# Altium PCB 120W_Syn_Buck_100kHz.PcbDoc
Units mm, origin at the board's own origin, x right, y up, seen from the top; angles counter-clockwise.
Board outline 120 x 80 mm, 2 copper layers (Top Layer, Bottom Layer); 58 components, 34 nets, 191 pads, 2 vias.
Unrouted connection lines stored in the file: 42.
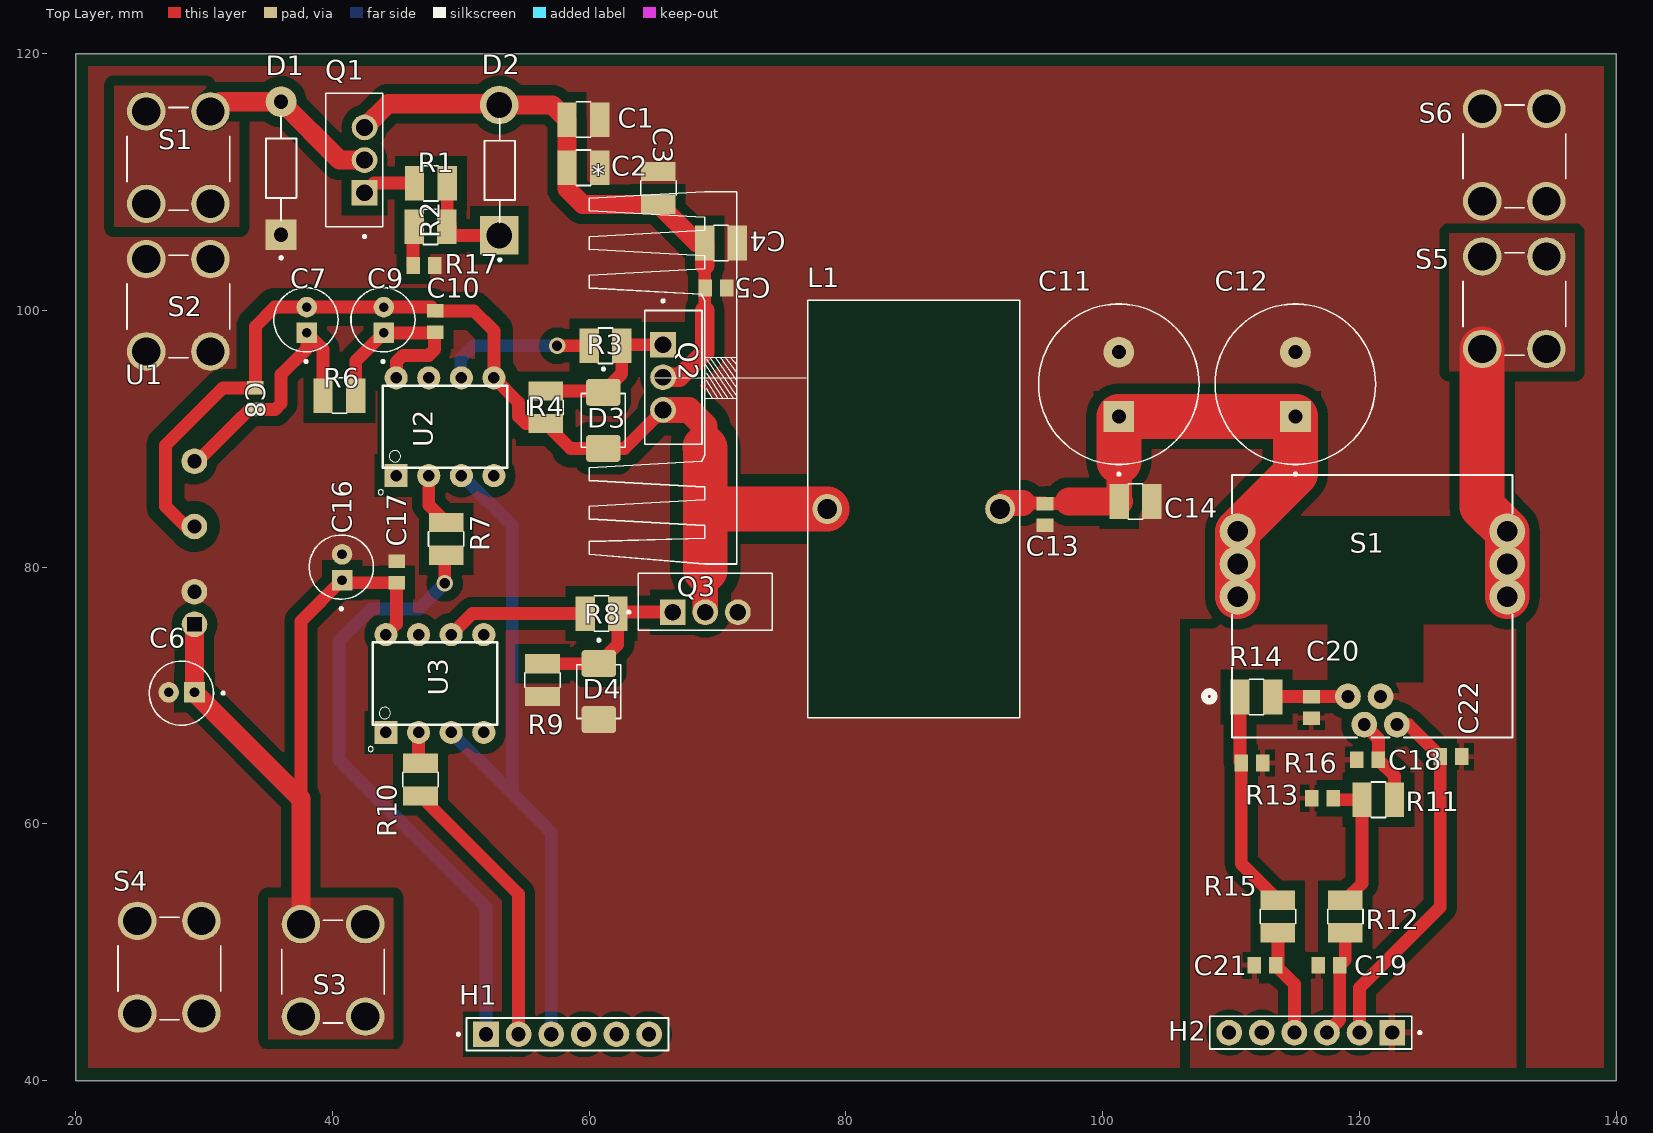
[diagram p0: Top Layer view]
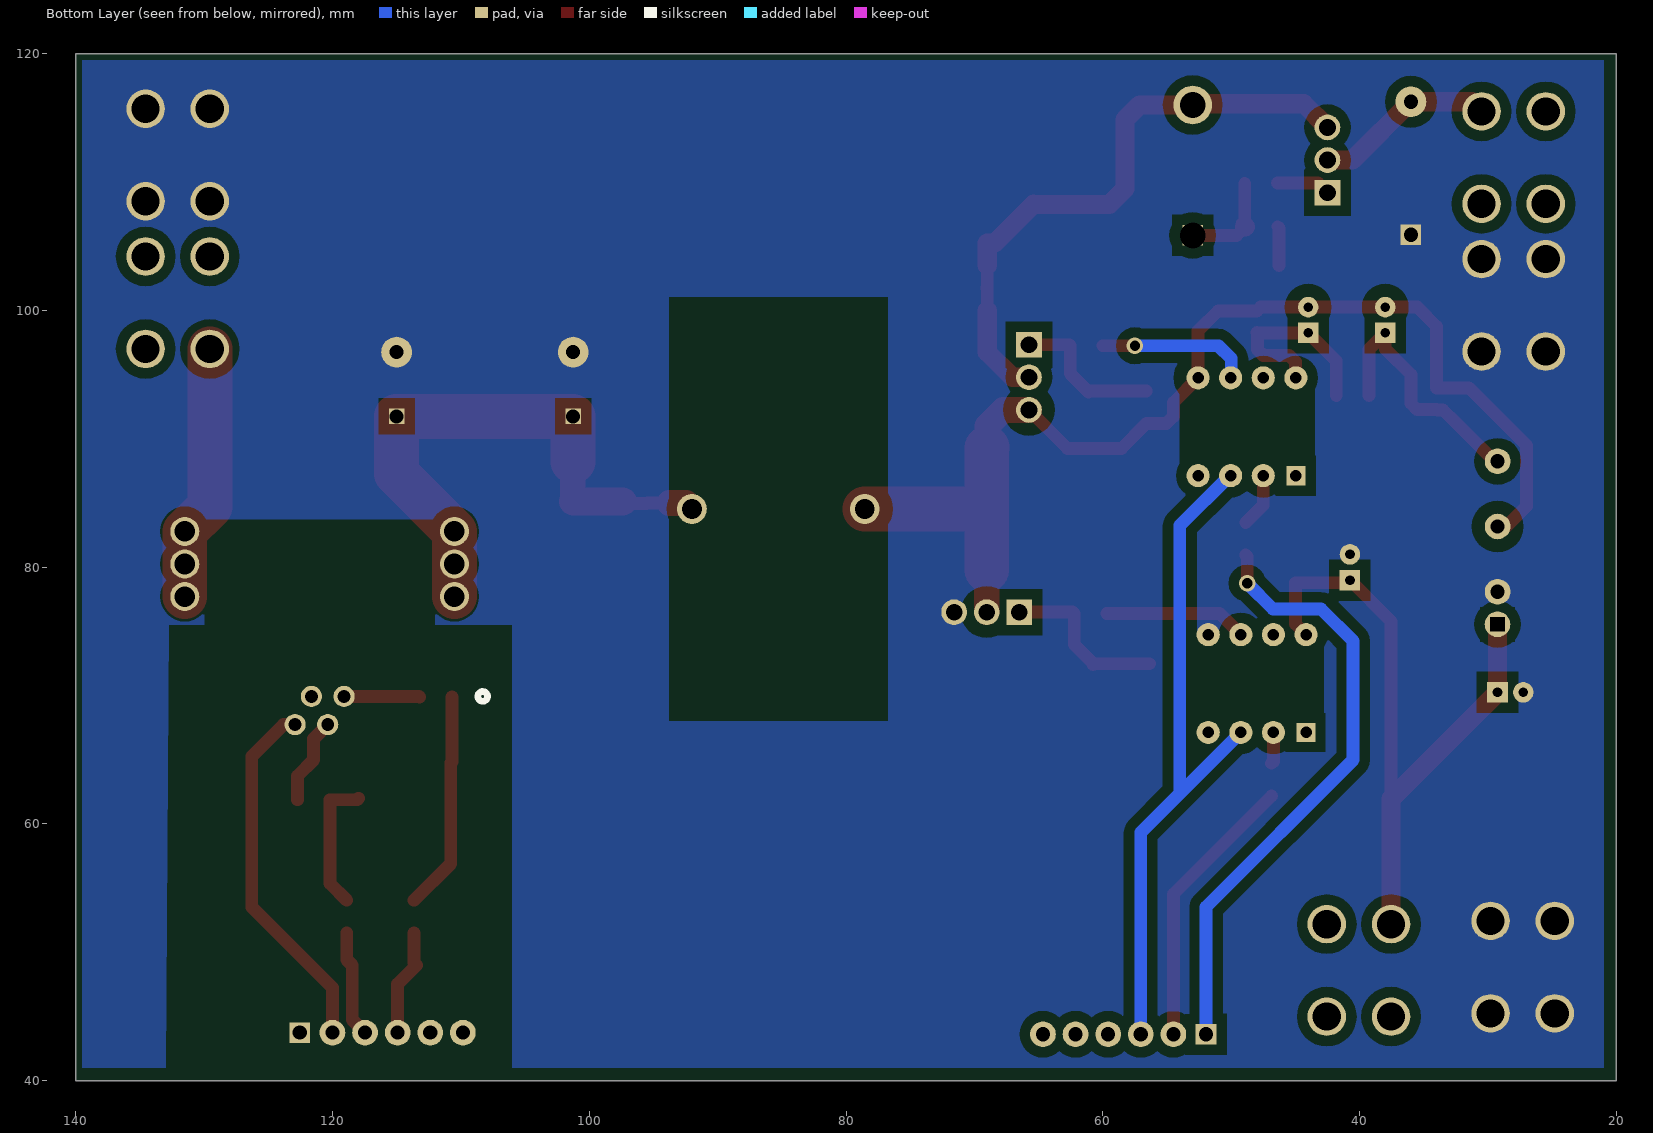
[diagram p1: Bottom Layer view, seen from below]

## Layer stack, top to bottom
Top Solder: solder mask 0.0102, Solder Resist, Dk 3.5
Top Layer: signal copper 0.0356
Dielectric 1: dielectric 0.32, FR-4, Dk 4.8
Bottom Layer: signal copper 0.0356
Bottom Solder: solder mask 0.0102, Solder Resist, Dk 3.5

## Board outline
20,40 140,40 140,120 20,120

## Design rules (kind name [scope] priority, off if disabled: settings)
Clearance Clearance_3 [InNet('HS_GND') vs InNet('PGND')] p1: gap=1 ignorepadtopadclearanceinfootprint=FALSE
Clearance Clearance_1 [All] p2: gap=0.8 ignorepadtopadclearanceinfootprint=FALSE except(0.5: THPad-THPad)
Clearance Clearance_2 [InNet('SGND')] p3: gap=1 ignorepadtopadclearanceinfootprint=FALSE
PlaneClearance [All] p1: clearance=0.5
PolygonConnect PolygonConnect_SGND [InNet('SGND')] p1: thpad.connectstyle=Relief thpad.reliefconductorwidth=0.5 thpad.reliefentries=4 thpad.polygonreliefangle="90 Angle" thpad.airgapwidth=0.5 smdpad.connectstyle=Relief smdpad.reliefconductorwidth=0.4 smdpad.reliefentries=4 smdpad.polygonreliefangle="90 Angle" smdpad.airgapwidth=0.4 via.connectstyle=Relief via.reliefconductorwidth=0.4 via.reliefentries=4 via.polygonreliefangle="90 Angle" via.airgapwidth=0.4
PolygonConnect PolygonConnect_PGND [InNet('PGND')] p2: connectstyle=Direct reliefconductorwidth=0.254 reliefentries=4 polygonreliefangle="90 Angle" airgapwidth=0.254
RoomDefinition 120W_Syn_Buck_Schematic [InComponentClass('120W_Syn_Buck_Schematic')] p1: confinementstyle=ConfineIn formatcopy=TRUE lockcomponents=FALSE outline 178.993,26.924 614.603,26.924 614.603,72.898 178.993,72.898
RoutingVias [InNet('No Net')] p1: holewidth=0.8 width=1.4 viastyle="Through Hole" minholewidth=0.8 minwidth=1.4 maxholewidth=0.8 maxwidth=1.8
SolderMaskExpansion [All] p1: expansion=0.102 istentingtop=FALSE
Width Width_1 [InNet('No Net')] p1: maxlimit=6 minlimit=0.7 preferedwidth=3 minimp=50.000000 maximp=50.000000 favimp=50.000000
29 further rules are at their usual default settings.

## Classes and differential pairs
component class 120W_Syn_Buck_Schematic: C1 C2 C3 C4 C5 C6 C7 C8 C9 C10 C11 C12 C13 C14 C16 C17 C18 C19 C20 C21 C22 D1 D2 D3 D4 H1 H2 L1 Q1 Q2 Q3 R1 R3 R4 R6 R7 R8 R9 R10 R11 R12 R13 R14 R15 R16 R17 S1 S2 S3 S4 S5 S6 U1 U2 U3

## Components (designator, comment, footprint, x,y, rotation, side; value= is the part's Value field where it differs from the comment)
* "45AS_HEATSINK" 45AS_HEATSINK 71.5,94.75 r90 top
C1 "1uF" 1210 59.5,114.75 r180 top
C2 "1uF" 1210 59.5,111 r180 top
C3 "1uF" 1210 65.5,109.5 r270 top
C4 "1uF" 1210 70.228,105.138 r180 top
C5 "100nF" 0805 69.75,101.75 r180 top
C6 "2.2uF" CAP_ELECTROLYTIC_2MM_5X11MM 31.619,70.072 r180 top
C7 "2.2uF" CAP_ELECTROLYTIC_2MM_5X11MM 37.822,95.888 r90 top
C8 "100nF" 0805 34,93 r270 top
C9 "22uF" CAP_ELECTROLYTIC_2MM_5X11MM 43.822,95.888 r90 top
C10 "100nF" 0805 48,99 r270 top
C11 "470uF" CAP_ELECTROLYTIC_5MM_12.5X25MM 100.723,83.751 r90 top
C12 "470uF" CAP_ELECTROLYTIC_5MM_12.5X25MM 114.473,83.751 r90 top
C13 "100nF" 0805 95.5,84.25 r90 top
C14 "1uF" 1210 102.5,85 r180 top
C16 "22uF" CAP_ELECTROLYTIC_2MM_5X11MM 40.572,76.631 r90 top
C17 "100nF" 0805 45,79.5 r270 top
C18 "4.7nF" 0805 120.75,65 r0 top
C19 "1nF" 0805 117.75,49 r0 top
C20 "47nF" 0805 116.25,69.215 r90 top
C21 "1nF" 0805 112.75,49 r0 top
C22 "47nF" 0805 127,65.25 r180 top
D1 "TVS 58V" TVS_DIODE_DO-15 34.273,106.098 r90 top
D2 "12V ZENER" ZENER_DIODE_DO-201 49.19,101.776 r90 top
D3 "15V ZENER" DO214AA_DIODE 59.5,93.75 r90 top
D4 "15V ZENER" DO214AA_DIODE 59.15,72.626 r90 top
H1 "6 Pin Header" 6_PINS_HEADER_FEMALE 49.674,43.498 r0 top
H2 "6 Pin Header" 6_PINS_HEADER_FEMALE 124.826,43.877 r180 top
L1 "80uH" "TOROIDAL INDUCTOR" 86.92,83.979 r0 top
Q1 "IRF5210PBF" IRF5210PBF_TO-220 42.452,105.741 r90 top
Q2 "IRF3710PBF" IRF3710PBF_TO-220 65.671,101.013 r270 top
Q3 "IRF3710PBF" IRF3710PBF_TO-220 62.817,76.421 r0 top
R1 "10k ohms" 1210 47.628,109.788 r180 top
R2 "10k ohms" 1210 47.6,106.4 r180 top
R3 "4.7 ohms" 1210 61.312,97.362 r0 top
R4 "10k ohms" 1210 56.5,92.5 r90 top
R6 "1 ohms" 1210 40.5,93.25 r180 top
R7 "200 ohms" 1210 48.75,82.25 r90 top
R8 "4.7 ohms" 1210 61,76.5 r0 top
R9 "10k ohms" 1210 56.25,71.25 r90 top
R10 "200 ohms" 1210 46.75,63.5 r90 top
R11 "10k ohms" 1210 121.5,62 r0 top
R12 "200 ohms" 1210 119,52.75 r270 top
R13 "20k ohms" 0805 117.25,62 r0 top
R14 "10k ohms" 1210 112,70 r0 top
R15 "200 ohms" 1210 113.75,52.75 r270 top
R16 "20k ohms" 0805 111.5,64.75 r180 top
R17 "20k ohms" 0805 47.25,103.5 r0 top
S1 "Screw Terminal" SCREW_TERMINAL_5x7.2MM_2MM 27.95,111.8 r0 top
S1 "Current Sensor" HLSR-10P 107.284,84.418 r0 top
S2 "Screw Terminal" SCREW_TERMINAL_5x7.2MM_2MM 27.95,100.3 r0 top
S3 "Screw Terminal" SCREW_TERMINAL_5x7.2MM_2MM 40,48.5 r0 top
S4 "Screw Terminal" SCREW_TERMINAL_5x7.2MM_2MM 27.25,48.75 r0 top
S5 "Screw Terminal" SCREW_TERMINAL_5x7.2MM_2MM 132,100.5 r0 top
S6 "Screw Terminal" SCREW_TERMINAL_5x7.2MM_2MM 132,112 r0 top
U1 "B1212S-2WR3L" B1212S-2WR3L_SIP-4 28.615,75.55 r90 top
U2 "TLP250H" TLP250H_DIP-8 44.706,85.479 r90 top
U3 "TLP250H" TLP250H_DIP-8 43.916,65.479 r90 top

## Footprints (in the part's own frame and the unit in brackets; to place one, negate y for a bottom-side part, rotate by r counter-clockwise, add the part's x,y. Pads: shape width x height; smd on the part's side, far side on the other; paste and mask are expansions set on the pad)
6_PINS_HEADER_FEMALE [mm]
  rect 2x2 / inner round 1.605 / far side rect 1.605x1.605 hole 1.1: 1(2.286,0.127)
  rect 1.605x1.605 / inner round 1.605 / far side rect 1.605x1.605 hole 1.07: 1(2.286,0.127)
  round 2 hole 1.1: 2(4.826,0.127) 3(7.366,0.127) 4(9.906,0.127) 5(12.446,0.127) 6(14.986,0.127)
  round 1.605 hole 1.07: 2(4.826,0.127) 3(7.366,0.127) 4(9.906,0.127) 5(12.446,0.127) 6(14.986,0.127)
  silkscreen extent 0.04,-1.14 16.51,1.4, body extent 0.76,-1.14 16.51,1.4, height 8.51
45AS_HEATSINK [mm]
  silkscreen extent -14.5,-5.4 14.5,11.5, body extent -14.48,0 14.51,11.56, height 30
0805 [mm]
  rect 1.05x1.3 smd: 1(-0.965,0) 2(0.711,0)
  body extent -1.13,-0.63 0.88,0.63, height 0.94
1210 [mm]
  rect 1.5x2.7 smd: 1(-1.312,-0.112) 2(1.228,-0.112)
  silkscreen extent -0.6,-1.49 0.52,1.27, body extent -1.64,-1.36 1.56,1.14, height 1.5
B1212S-2WR3L_SIP-4 [mm]
  round 2 hole 1.1 square mask+0.102: 1(0,-0.644)
  round 2 hole 1.1 mask+0.102: 2(2.54,-0.635) 4(7.62,-0.635) 6(12.7,-0.635)
  body extent -1.5,-2 17.93,4.98, height 14.1
CAP_ELECTROLYTIC_2MM_5X11MM [mm]
  rect 1.6x1.6 hole 0.75: 1(2.362,-0.178)
  round 1.6 hole 0.75: 2(4.369,-0.178)
  silkscreen extent 0.03,-2.62 5.88,2.38, body extent 0.88,-2.62 5.88,2.38, height 11
CAP_ELECTROLYTIC_5MM_12.5X25MM [mm]
  rect 2.4x2.4 / inner round 1.2 / far side rect 1.2x1.2 hole 1.1: 1(7.999,-0.527)
  round 2.4 hole 1.1: 2(12.999,-0.527)
  silkscreen extent 3.4,-6.78 16.75,5.72, body extent 4.25,-6.77 16.75,5.72, height 25
DO214AA_DIODE [mm]
  rrect25% 2.1x2.7 smd paste+0: 1(-4.496,-1.6)
  rrect25% 2.1x2.7 smd: 2(-0.126,-1.6)
  silkscreen extent -4.41,-3.32 1.79,0.11, body extent -5.03,-3.38 0.41,0.18, height 2.46
HLSR-10P [mm]
  round 2 / inner round 1.524 / far side round 1.651 hole 1 paste-0.826 mask+0: 1(11.811,-14.478) 2(13.081,-16.678) 3(14.351,-14.478) 4(15.621,-16.678)
  round 2.8 / inner round 1.524 / far side round 2.261 hole 1.6 paste-1.13 mask-1.13: 5(24.216,-6.708) 6(24.216,-4.168) 7(24.216,-1.628) 8(3.216,-1.628) 9(3.216,-4.168) 10(3.216,-6.708)
  silkscreen extent 0.64,-17.69 24.64,2.76, body extent 2.29,-17.78 25.15,0.76, height 12
IRF3710PBF_TO-220 [mm]
  rect 2x2 hole 1.3: 1(3.683,0.079)
  round 2 hole 1.3: 2(6.223,0.079) 3(8.763,0.079)
  silkscreen extent 0.17,-1.33 11.43,3.11, body extent 1.02,-1.4 11.43,3.05, height 19.3
IRF5210PBF_TO-220 [mm]
  rect 2x2 hole 1.3: 1(3.429,-0.048)
  round 2 hole 1.3: 2(5.969,-0.048) 3(8.509,-0.048)
  silkscreen extent -0.09,-1.46 11.18,2.98, body extent 0.76,-1.52 11.18,2.92, height 19.3
SCREW_TERMINAL_5x7.2MM_2MM [mm]
  round 3 hole 2.2: 1(-2.45,-3.5) 1(-2.45,3.7) 1(2.55,-3.5) 1(2.55,3.7)
  silkscreen extent -3.95,-4 4.05,4, body extent -4.55,-3.51 4.59,4.36, height 17.34
TLP250H_DIP-8 [mm]
  rect 1.5x1.5 / inner round 1.5 / far side rect 1.5x1.5 hole 0.9: 1(1.651,-0.254)
  rect 1.8x1.8 / inner round 1.5 / far side rect 1.5x1.5 hole 0.9: 1(1.651,-0.254)
  round 1.5 hole 0.9: 2(1.651,-2.794) 3(1.651,-5.334) 4(1.651,-7.874) 5(9.271,-7.874) 6(9.271,-5.334) 7(9.271,-2.794) 8(9.271,-0.254)
  round 1.8 hole 0.9: 2(1.651,-2.794) 3(1.651,-5.334) 4(1.651,-7.874) 5(9.271,-7.874) 6(9.271,-5.334) 7(9.271,-2.794) 8(9.271,-0.254)
  silkscreen extent 0.16,-8.91 8.66,1.14, body extent 1.44,-9.15 9.48,1.03, height 4.51
"TOROIDAL INDUCTOR" [mm]
  round 2.325 hole 1.55 mask+0.102: 1(-8.382,0.559) 2(5.08,0.559)
  silkscreen extent -9.91,-15.7 6.6,16.81, body extent -9.91,-15.65 6.6,16.77, height 34.1
TVS_DIODE_DO-15 [mm]
  rect 2.4x2.4 / inner round 1.59 / far side rect 1.59x1.59 hole 1.1 mask+0.102: 1(-0.208,-1.727)
  rect 1.59x1.59 / inner round 1.59 / far side rect 1.59x1.59 hole 1.06 mask+0.102: 1(-0.202,-1.739)
  round 2.4 hole 1.1 mask+0.102: 2(10.152,-1.727)
  round 1.59 hole 1.06 mask+0.102: 2(10.158,-1.739)
  silkscreen extent -2.1,-2.93 9.04,-0.54, body extent -0.73,-3.09 10.41,-0.37, height 2.72
ZENER_DIODE_DO-201 [mm]
  rect 1.59x1.59 / inner round 1.59 / far side rect 1.59x1.59 hole 1.06 mask+0.102: 1(4.064,-3.81)
  rect 3x3 / inner round 1.59 / far side rect 1.59x1.59 hole 2 mask+0.102: 1(4.064,-3.81)
  round 1.59 hole 1.06 mask+0.102: 2(14.224,-3.81)
  round 3 hole 2 mask+0.102: 2(14.224,-3.81)
  silkscreen extent 2.06,-5.03 13.2,-2.66, body extent 3.54,-5.23 14.68,-2.51, height 2.72

## Part data
C1 C2 C3 C4 C14: library part HMK325B7105KN-T, "1uF  MLCC (3225) 1210 1uF 100V 10% X7R"
C5 C8 C10 C13 C17: library part AC0805KKX7R0BB104, "100nF  MLCC (2012) 0805 100nF 100VDC ±10% X7R AUTOMOTIVE"
C6 C7: library part PKRI-050V2R2MC110-T/A5.0, "2.2uF Electrolytic Capacitor"
C9 C16: library part PKRM-050V220MC110-T/A5.0, "22uF Electrolytic Capacitor"
C11 C12: library part EEUFC1H471, "470uF Electrolytic Capacitor"
C18: library part CL21C472JBFNNNE, "4.7nF MLCC (2012) 0805 4.7nF 50VDC ±5%  0G (NP0)"
C19 C21: library part CC0805JRNPO9BN1021, "1nF  MLCC (2012) 0805 1nF 50VDC ±5% C0G (NP0)"
C20 C22: library part CC0805JRX7R9BB473, "47nF MLCC (2012) 0805 47nF 50VDC ±5% X7R"
D1: library part P6KE68A-TKS, "TVS Diode 58.1V 600W"
D2: library part 1N5349B, "12V Zener Diode 5W"
D3 D4: library part 1SMB5929BT3G, "15V ZENER DIODE 3W"
H1: library part DS1023-1X6S21
H2: library part DS1023-1X6S21, "6x1 FEMALE HEADER"
L1: library part INDUCTOR_LAB-MADE, "80uH Inductor"
Q1: "P-Channel Power MOSFET, TO-220AB, -100V, -40A,"
Q2 Q3: "N-Channel Power MOSFET, TO-220AB, 100V, 57A"
R1 R2 R4 R9 R11 R14: library part "Resistor 10k ohms"
R3 R8: library part "Resistor 4.7 ohms"
R6: library part "Resistor 1 ohm"
R7 R10 R12 R15: library part "Resistor 200 ohms"
R13 R16 R17: library part "Resistor 20k ohms"
S1 S2 S3 S4 S5 S6: library part K14-00AH, "1 Pin Screw Terminal"
S1: library part HLSR-10P, "10A Hall effect, open loop, +-20A, isolated"
U1: "12V-12V isolated DC-DC, 2W, Hi-Link, SIP-6, Pins 3,5 NC"
U2 U3: "LED Optocoupler, VCC-GND 100nF bypass"

## Via types
v1: diameter 1.27, hole 0.8, Top Layer to Bottom Layer, 2 vias

## Nets (pads, with @x,y where several pads share a name; then routed paths per layer and width w, separated by ;. In a path a pad name is that pad's centre, name@x,y a point inside that pad or via, vN(x,y) a via of type N, cw(c..) or ccw(c..) an arc to the next point about the centre after c; other vN are vias at no path point)
5V_SENSOR: C22.2 H2.2 S1.4 | length 28.5
  Top Layer w1: H2.2@120,43.75 120,47.25 121.75,49 126.289,53.539 C22.2 123.799,67.74 S1.4
12V_ISO: C7.1 C8.2 R6.2 U1.6
12V_RAW: C6.1 C16.1 C17.2 S3.1 U1.1 U3.8 | length 9.8
  Top Layer w1.5: S3.1@37.55,52.2 37.55,61.957
48V_PROT: C1.2 C2.2 C3.2 C4.2 C5.2 D2.2 Q1.3 Q2.2 | length 29.7
  Top Layer w1: 69,100 C5.2@69,101.711 ; C5.2@69,101.789 69,103.5
  Top Layer w1.5: C1.2 C2.2 58.272,109.478 59.5,108.25 C3.2@65.366,108.25 ; C3.2 C4.2@68.41,105.25 ; Q2.2 67.04,94.79 69,96.75 69,100 ; 69,103.5 C4.2
48V_RAW: D1.2 Q1.2 S1.1@25.5,108.3 S1.1@25.5,115.5 S1.1@30.5,108.3 S1.1@30.5,115.5
EN/DIS_GPIO: H1.4
FAULT: H1.5
HLSR_Vout: H2.3 R12.2 | length 16.7
  Top Layer w1: H2.3@117.46,43.75 118.461,44.751 118.461,49 118.888,49.427 R12.2 ; 118.888,54.062 120.188,55.362 120.188,61.888
HLSR_Vout_PIN: C18.2 R11.2 S1.2 | length 6.8
  Top Layer w1: S1.2 121.461,66.644 C18.2 122.728,63.733 R11.2
HLSR_Vref: C21.2 H2.4 R15.2 | length 66.6
  Top Layer w1: 110.688,64.851 110.688,69.888 ; 110.789,64.75 110.789,56.911 113.638,54.062 ; 113.267,69.926 116.25,69.926 ; C21.2 114.92,47.541 H2.4@114.92,43.75 ; C21.2@113.638,49.177 R15.2 ; 116.264,69.94 119.095,69.94
  Top Layer w2: 101.272,85.112 101.272,87.228
  Top Layer w2.2: 97.362,85.112 101.272,85.112
  Top Layer w3.5: 101.25,91.75 115,91.75 115,87.29 110.5,82.79 110.5,77.71
HLSR_Vref_PIN: C20.2 R14.2 S1.1@119.095,69.94
HS_GND: C7.2 C8.1 C9.2 C10.1 D3.1 L1.1 Q2.3 Q3.2 R4.1 U1.4 U2.5 | length 84.3
  Top Layer w1: U1.4@28.58,83.17 27,84.75 27,89.5 31.465,93.965 C8.1 34,98.75 35.507,100.257 C7.2 C9.2 C10.1@47.709,100.257 ; C10.1 50.215,99.965 51.035,99.965 52.5,98.5 ; 52.58,98.42 52.58,94.75 54.5,92.83 54.5,91.75 55,91.25 ; 55.062,91.188 R4.1 ; 58.547,89.254 D3.1 62.754,89.254 Q2.3
  Top Layer w2: Q2.3 67.75,92.25 69,91 ; Q3.2 69.04,79.782
  Top Layer w3.5: 69.04,79.782 69.04,89.293 ; 69.04,84.538 L1.1
HS_MOSFET_IN: R3.1 U2.6 | length 12.1
  Top Layer w1: 56.612,91.188 58.547,89.254
  Bottom Layer w1: U2.6@50,94.79 50,96.25 51,97.25 57.5,97.25
LS_MOSFET_IN: R8.1 U3.6 | length 11.1
  Top Layer w1: U3.6@49.25,74.75 50.888,76.388 R8.1
NetC9_1: C9.1 C10.2 R6.1 U2.8 | length 35.2
  Top Layer w1: 29.5,88.25 32.5,91.25 33.5,92.25 ; 34,92.289 35.539,92.289 36,92.75 36,95 38,97 38,98.25 39.272,96.978 39.272,93.362 ; R6.1 41.812,96.062 C9.1 47.961,98.25 47.961,96.961 47.5,96.5 45.5,96.5 45,96 U2.8@45,94.79
NetC15_2: 
NetD2_1: D2.1 R1.1 R2.1
NetD3_2: D3.2 Q2.1 R3.2 R4.2 | length 14.2
  Top Layer w1: R4.2 D3.2@60.996,93.728 ; 57.5,97.25 60,97.25 ; D3.2 62.54,95.063 R3.2 ; R3.2@62.62,97.33 Q2.1
NetD4_2: D4.2 Q3.1 R8.2 R9.2 | length 13
  Top Layer w1: R9.2 D4.2@60.682,72.478 ; D4.2 62.228,73.978 R8.2 ; R8.2@62.34,76.5 Q3.1
NetQ1_1: Q1.1 R1.2
NetR2_2: R2.2 R17.1
NetR7_2: R7.2 U2.2
NetR10_2: R10.2 U3.2 | length 2.2
  Top Layer w1: R10.2@46.71,64.88 U3.2@46.71,67.13
NetR11_1: R11.1 R12.1 R13.2 | length 2.1
  Top Layer w1: R13.2@118.073,61.888 R11.1
NetR14_1: R14.1 R15.1 R16.2
PGND: C1.1 C2.1 C3.1 C4.1 C5.1 C6.2 C11.2 C12.2 C13.1 C14.1 C16.2 C17.1 D1.1 D4.1 Q3.3 R9.1 R17.2 S2.1 S4.1 S6.1 U1.2 U3.5
SGND: C18.1 C19.1 C20.1 C21.1 C22.1 H1.3 H2.1 R13.1 R16.1 S1.3 U2.3 U3.3 | length 53
  Bottom Layer w1: U3.3@49.25,67.13 57.04,59.34 H1.3@57.04,43.625 ; U2.3@50.12,87.13 54,83.25 54,62.5
SPARE_ADC_1: H2.5
SPARE_ADC_2: H2.6
SPARE_CONTROL: H1.6
STM32_HS: H1.1 R7.1 | length 47.6
  Top Layer w1: 48.75,78.75 R7.1@48.75,80.826
  Bottom Layer w1: 48.75,78.75 46.75,76.75 43,76.75 40.5,74.25 40.5,65 51.96,53.54 H1.1@51.96,43.625
STM32_LS: H1.2 R10.1 | length 21.7
  Top Layer w1: R10.1 54.5,54.55 H1.2@54.5,43.625
Vout_OUT: S1.5 S1.6 S1.7 S5.1 | length 20.1
  Top Layer w3.5: S5.1@129.55,97 129.55,84.74 S1.7 S1.5
Vout_SENSOR_IN: C11.1 C12.1 C13.2 C14.2 L1.2 S1.8 S1.9 S1.10
pads on no net: C19.2 U2.1 U2.4 U2.7 U3.1 U3.4 U3.7
copper on no net: | length 114
  Top Layer w0: 92,84.538 92.538,84.538 ; 101.25,87.174 101.272,87.152 ; 101.25,87.25 101.25,87.75 101.25,88.25
  Top Layer w0.5: 117.46,43.75 117.461,43.751
  Top Layer w0.8: 46.235,106.375 46.372,106.512 ; 46.38,109.92 46.4,109.9 ; 48.94,106.54 48.912,106.512 49.24,106.84
  Top Layer w1: 28.58,83.17 29.25,83.17 ; 29.25,88.25 29.5,88.25 ; 33.5,92.25 33.961,92.25 34,92.289 ; 37.55,61.957 37.55,75.793 40.75,78.993 40.955,78.789 45,78.789 45,75.58 44.17,74.75 ; 42.5,109.17 43.25,109.92 46.38,109.92 ; 44.96,94.75 45,94.79 ; 46.285,103.5 46.285,106.425 46.372,106.512 ; 46.71,64.88 46.862,64.728 ; 47.5,87.13 47.5,84.84 48.862,83.478 ; 47.709,100.257 48,99.965 ; 47.961,98.25 48,98.289 ; 48.75,80.826 48.862,80.938 ; 48.94,109.9 48.94,106.54 48.912,106.512 49.584,105.84 53,105.84 ; 52.5,98.5 52.58,98.42 ; 55,91.25 55.062,91.188 ; 60.682,72.478 60.75,72.41 ; 60.996,93.728 61.1,93.624 ; 62.228,76.388 62.34,76.5 ; 62.54,97.25 62.62,97.33 ; 69,101.711 69.039,101.75 ; 69,101.789 69.019,101.769 ; 93.75,85 95.461,85 95.5,84.961 97.211,84.961 97.362,85.112 ; 110.688,64.851 110.789,64.75 ; 113.228,69.888 113.267,69.926 ; 113.461,49 113.638,49.177 ; 116.25,69.926 116.264,69.94 ; 117.961,62 118.073,61.888
  Top Layer w1.5: 29.259,75.55 29.257,75.548 29.257,70.25 37.55,61.957 ; 31.256,116.256 30.5,115.5 31.25,116.25 36,116.25 ; 36.012,116.256 40.558,111.71 42.5,111.71 ; 42.5,114.25 44.344,116.094 53.037,116.094 ; 48.912,106.512 48.94,106.54 ; 53,116 57.134,116 58.272,114.862 ; 65.366,108.25 65.388,108.272 ; 68.41,105.25 69,105.25 ; 69.04,76.5 69.04,77.29
  Top Layer w2: 69,89.5 69,91 ; 92,84.538 92.462,85 93.774,85
  Top Layer w3.5: 69,89.333 69.04,89.293 ; 101.25,88.25 101.25,89 101.25,89.75 101.25,91.75
  Bottom Layer w1: 50,94.79 50.04,94.75 ; 50.04,87.13 50.12,87.13 50.08,87.13
  other v1: 48.75,78.75 57.5,97.25

## Polygon pours and split planes (outlines as drawn)
PGND on Top Layer "NONET_L-01_P-001" (solid, pour order 3): 21,119 21,41 22.5,42.5 106,42.5 106,76 112,76 112,84 130,84 130,76 133,76 133,41 139,41 139,119
SGND on Top Layer "NONET_L-01_P-001" (solid, pour order 5): 106.5,75.5 106.5,41 132.5,41 132.5,75.5
48V_RAW on Top Layer "NONET_L-01_P-001" (solid, pour order 0): 23,117.5 23,106.5 32.75,106.5 32.75,106.75 32.75,117.5
PGND on Top Layer "NONET_L-01_P-001" (solid, pour order 4): 106,42.5 106,41 105.5,41 21,41 21,42.5
Vout_OUT on Top Layer "NONET_L-01_P-001" (solid, pour order 2): 127,106 127,95.25 136.75,95.25 136.75,106
12V_RAW on Top Layer "NONET_L-01_P-001" (solid, pour order 1): 35,54.25 35,43.25 44.75,43.25 44.75,43.5 44.75,54.25
PGND on Bottom Layer "NONET_L-01_P-001" (solid, pour order 6): 21,41 106,41 106,75.5 112,75.5 112,83.75 130,83.75 130,75.5 132.75,75.5 133,41 139.5,41 139.5,119.5 21,119.5

## Other copper
Top Layer:
  pour cut-out: 77.014,100.794 77.014,68.282 93.524,68.282 93.524,100.794
  pour cut-out: 117.5,76.75 117.5,71 125,71 125,76.75
  pour cut-out: 130,75.75 130,83.75 112,83.75 112,75.75 112.25,75.75
  pour cut-out: 42.75,75 42.75,66.75 53.5,66.75 53.5,75
  pour cut-out: 43.5,95 43.5,87 54,87 54,95
Bottom Layer:
  pour cut-out: 76.764,101.044 76.764,68.032 93.774,68.032 93.774,101.044
  pour cut-out: 42.75,75 42.75,66.75 53.5,66.75 53.5,75
  pour cut-out: 43.5,95 43.5,87 54,87 54,95